# Altium PCB BoardV2.PcbDoc (part 1 of 2)
Units mm, origin at the board's own origin, x right, y up, seen from the top; angles counter-clockwise.
Board outline 173.2 x 200 mm, 2 copper layers (Top Layer, Bottom Layer); 157 components, 96 nets, 533 pads, 72 vias.
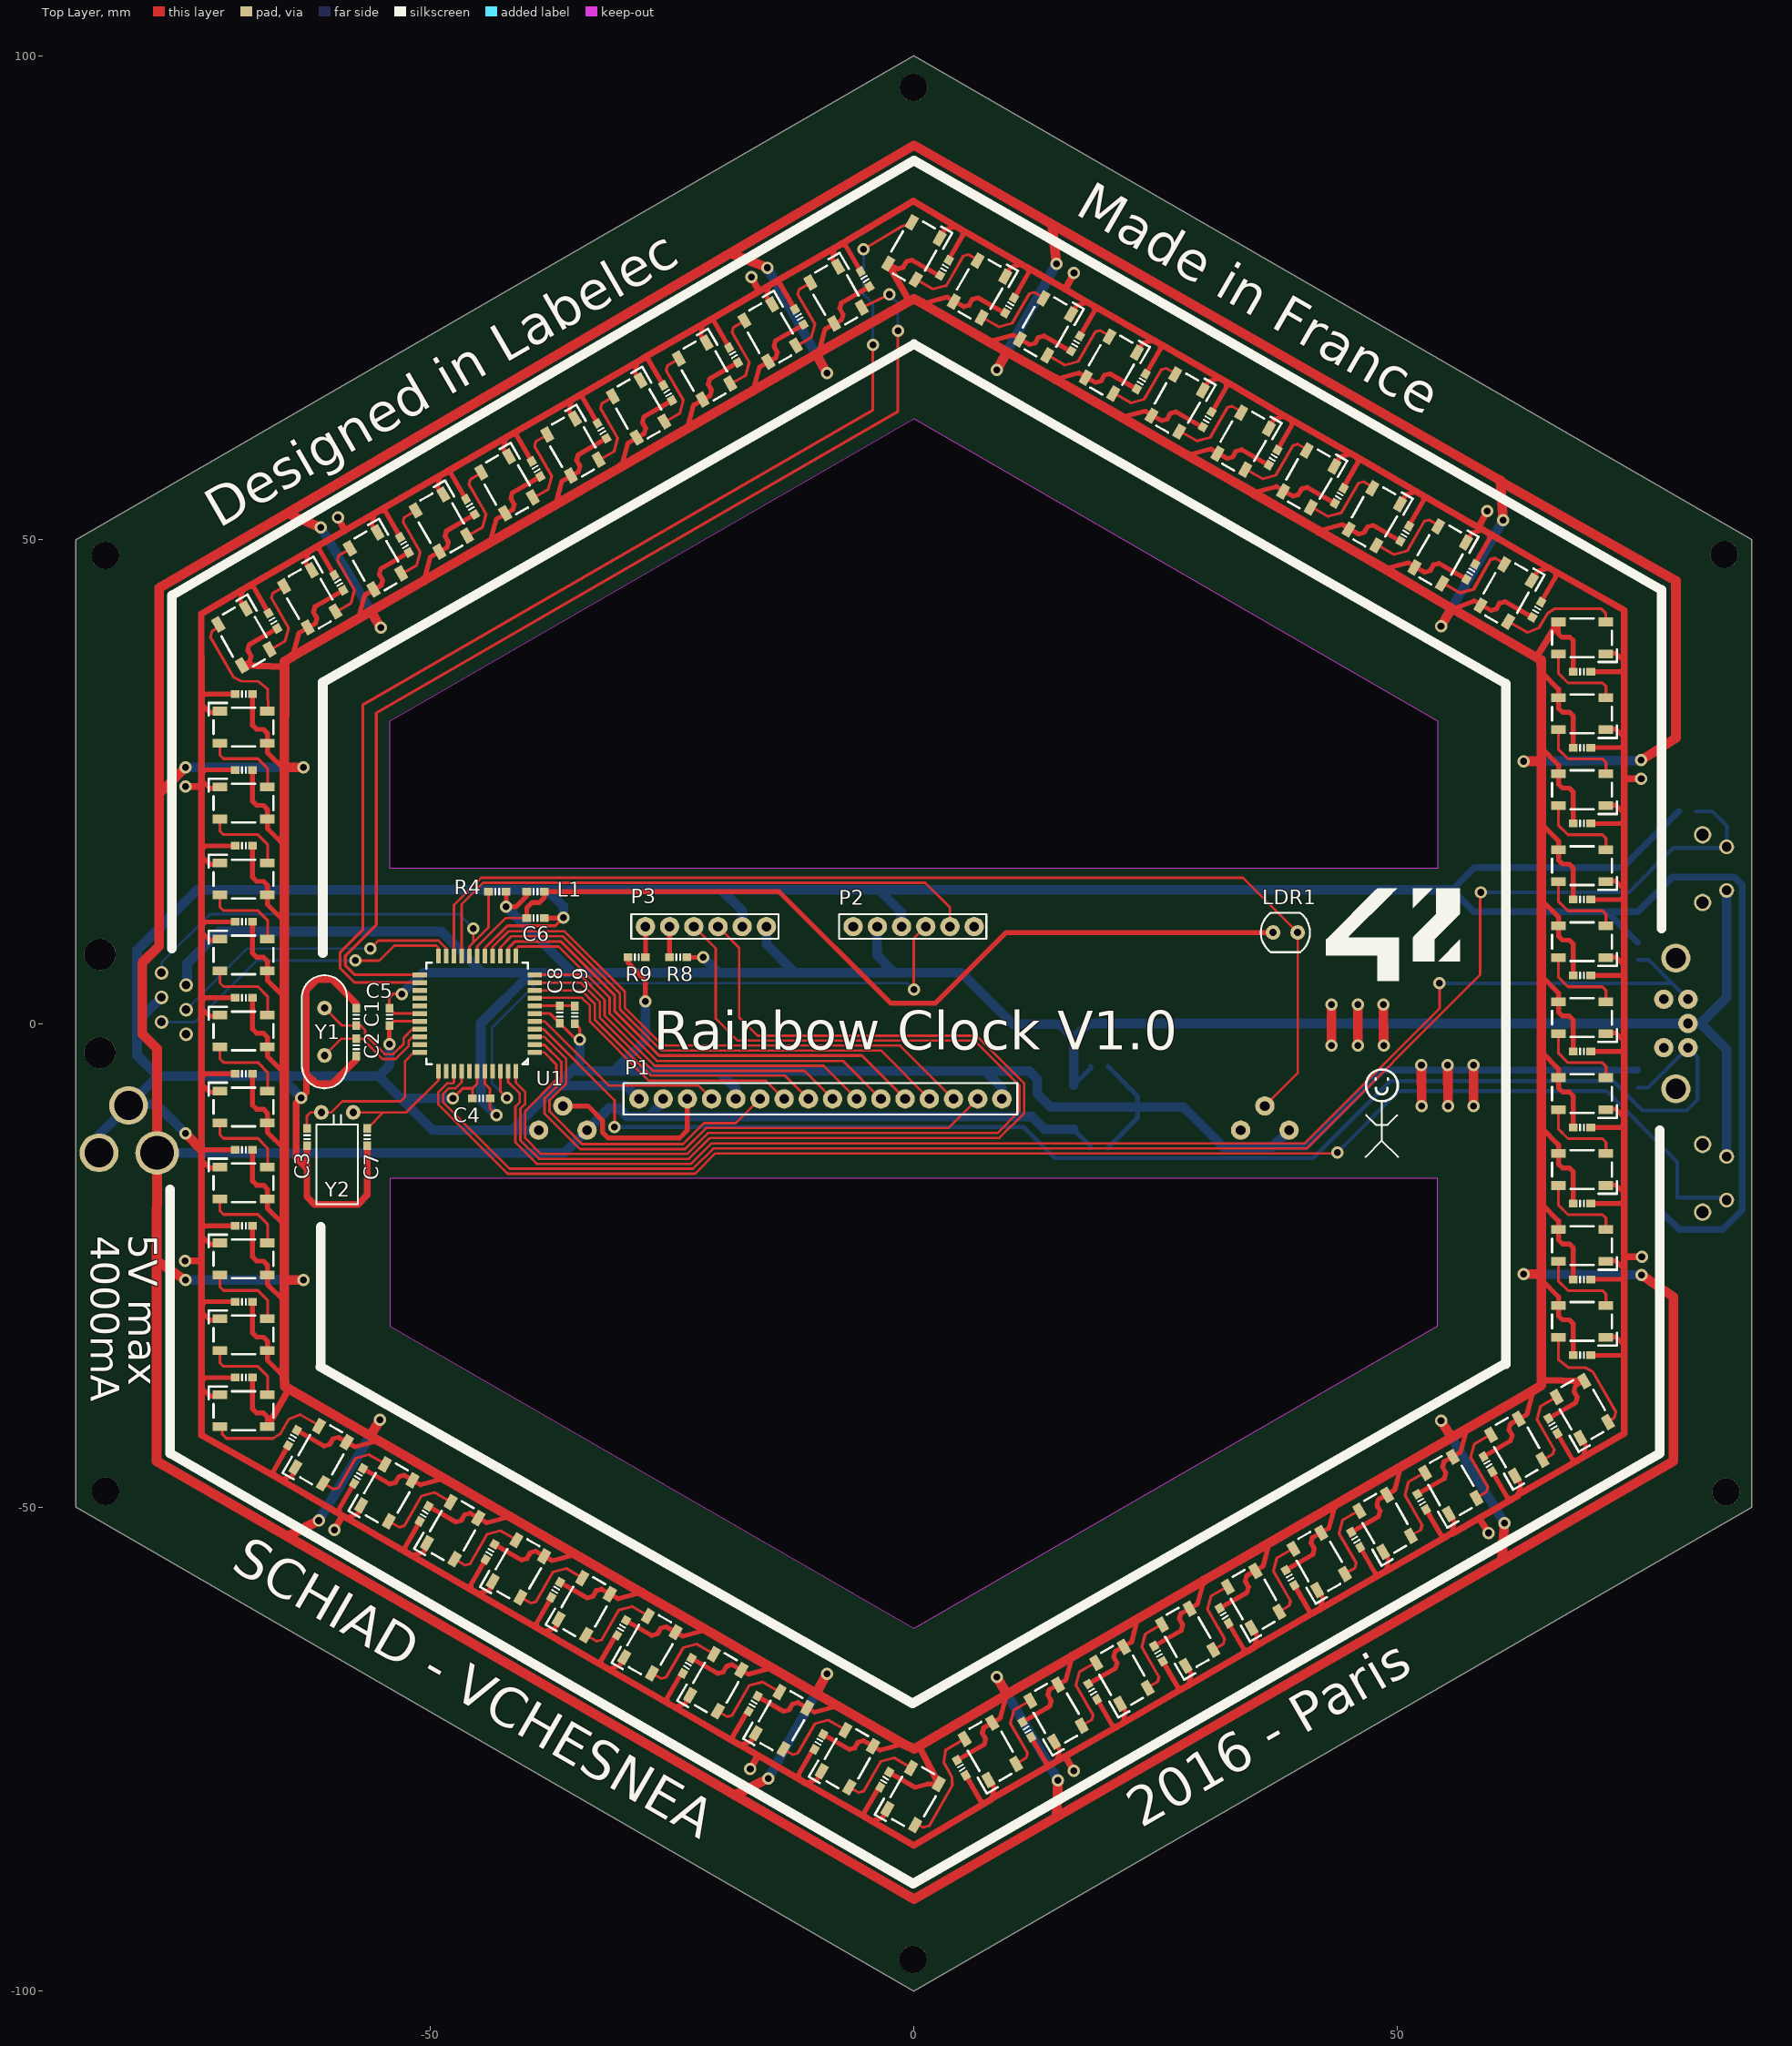
[diagram p0: Top Layer view]
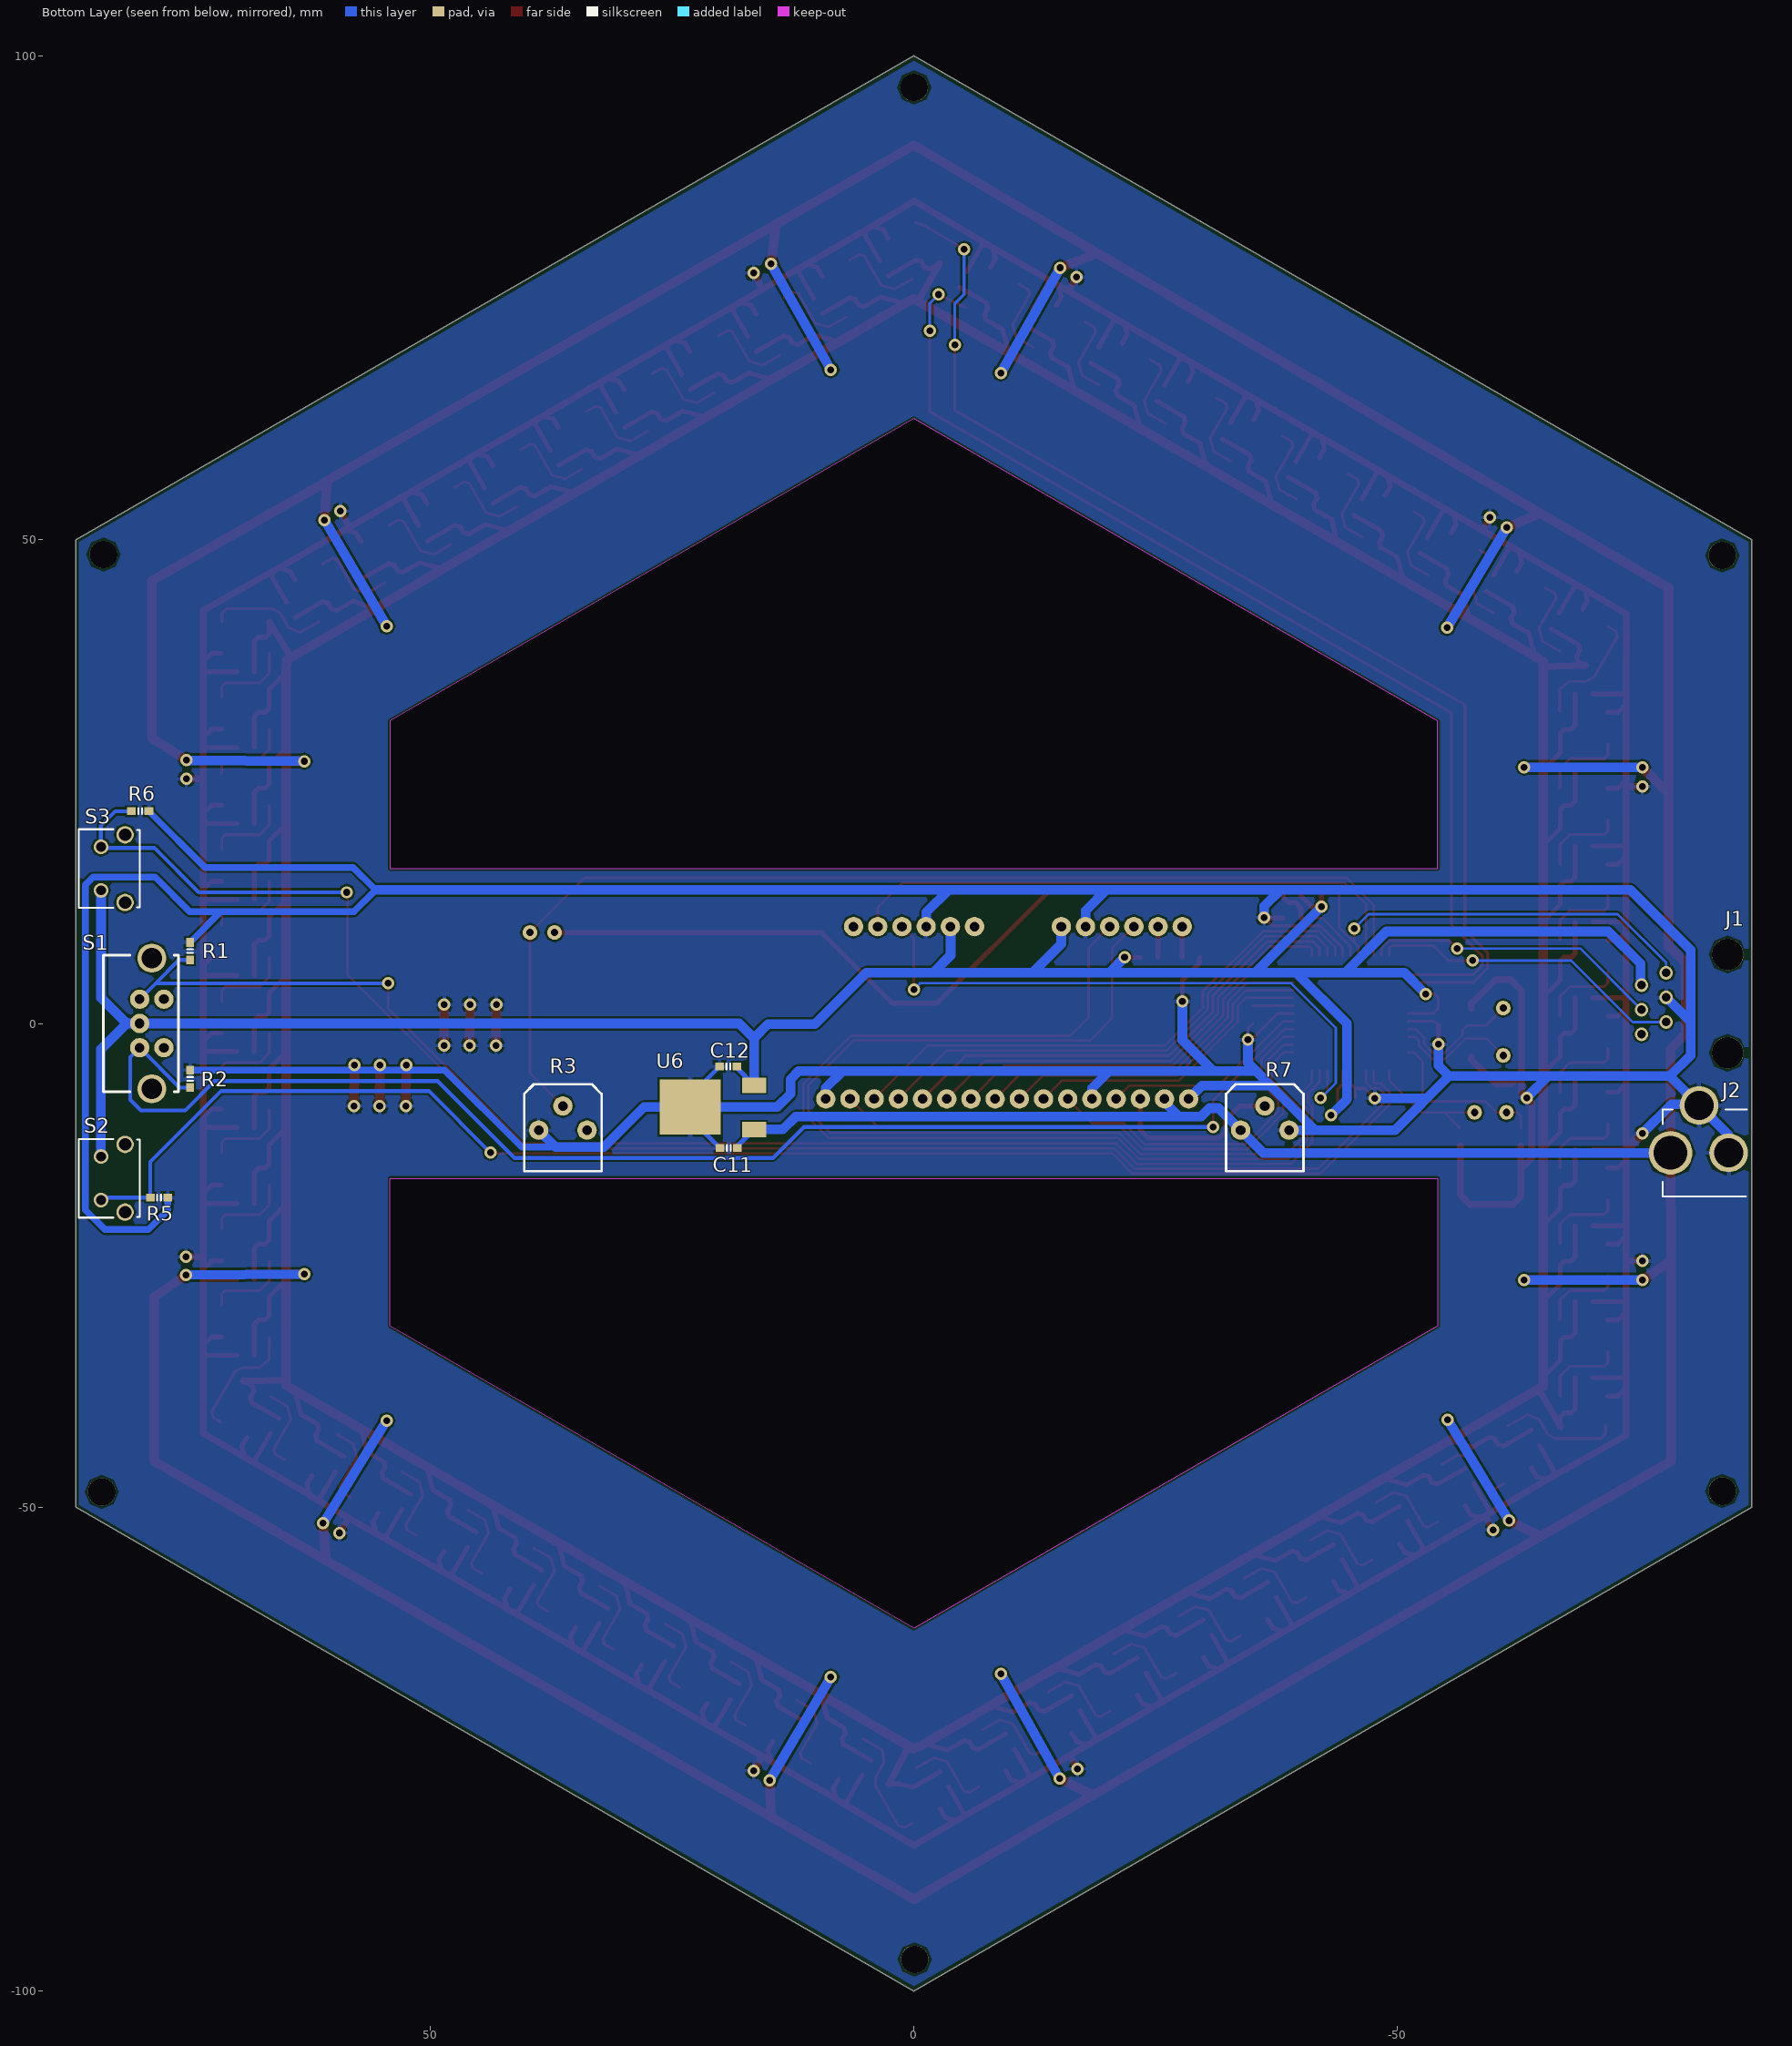
[diagram p1: Bottom Layer view, seen from below]

## Layer stack, top to bottom
Top Solder: solder mask 0.0102, Solder Resist, Dk 3.5
Top Layer: signal copper 0.0356
Dielectric 1: dielectric 0.32, FR-4, Dk 4.8
Bottom Layer: signal copper 0.0356
Bottom Solder: solder mask 0.0102, Solder Resist, Dk 3.5

## Board outline
-86.6,-50 0,-100 86.6,-50 86.6,50 0,100 -86.6,50
cut-out: -54.125,-16 -54.125,-31.25 0,-62.5 54.125,-31.25 54.125,-16
cut-out: -54.125,16 -54.125,31.25 0,62.5 54.125,31.25 54.125,16

## Design rules (kind name [scope] priority, off if disabled: settings)
AssemblyTestPointUsage [All] p1 off:
AssemblyTestpoint [All] p1 off: testpointundercomponent=TRUE minsize=1.016 maxsize=2.54 preferedsize=1.524 minholesize=0 maxholesize=1.016 preferedholesize=0.813 testpointgrid=0.025 usegrid=TRUE gridtolerance=0 allowsidetop=TRUE allowsidebottom=TRUE
Clearance [All] p1: gap=0.2
FabricationTestPointUsage [All] p1 off: valid=0 allowmultiple=FALSE
FabricationTestpoint [All] p1 off: side=3 testpointundercomponent=TRUE minsize=1.016 maxsize=2.54 preferedsize=1.524 minholesize=0 maxholesize=1.016 preferedholesize=0.813 testpointgrid=0.025 allowsidetop=TRUE allowsidebottom=TRUE usegrid=TRUE gridtolerance=0
HoleSize [All] p1: absolutevalues=TRUE maxlimit=3.5 minlimit=0.025 maxpercent=80.000 minpercent=20.000
MinimumSolderMaskSliver [All] p1: minsoldermaskwidth=0.05
PlaneConnect [All] p1: planeconnectstyle=Direct reliefexpansion=0.508 reliefentries=4 reliefconductorwidth=1 reliefairgap=0.254
PolygonConnect "PolygonConnect ALIM" [InNet('V5','GND')] p1: connectstyle=Relief reliefconductorwidth=0.4 reliefentries=4 polygonreliefangle="90 Angle" airgapwidth=0.254
PolygonConnect [All] p2: connectstyle=Relief reliefconductorwidth=0.254 reliefentries=4 polygonreliefangle="90 Angle" airgapwidth=0.254
RoutingVias [All] p1: holewidth=0.711 width=1.27 viastyle="Through Hole" minholewidth=0.711 minwidth=1.27 maxholewidth=0.711 maxwidth=1.27
SilkToSilkClearance [All] p1: silktosilkclearance=0.2
SilkToSolderMaskClearance [IsPad] p1: minsilkscreentomaskgap=0 clearancetoexposedcopper=TRUE
SolderMaskExpansion [All] p1: expansion=0.102
UnpouredPolygon [All] p1: allowunpoured=FALSE
Width [All] p1: maxlimit=1 minlimit=0.254 preferedwidth=0.254 minimp=50.000000 maximp=50.000000 favimp=50.000000
20 further rules are at their usual default settings.

## Classes and differential pairs
net class D[0..7]: D0 D1 D2 D3 D4 D5 D6 D7
component class TEMPERATURE: P3 R8 R9
component class RainbowClock: C1 C2 C3 C4 C5 C6 C7 C8 C9 J1 LDR1 R1 R2 R3 R4 R5 R6 S1 S2 S3 U1 Y1 Y2
component class LCD: P1 R7
component class BLUETOOTH: P2
component class POWER: C11 C12 J2 L1 U6
channel class Neopixel: NeoPixel1 NeoPixel2 NeoPixel3 NeoPixel4 NeoPixel5 NeoPixel6 NeoPixel7 NeoPixel8 NeoPixel9 NeoPixel10 NeoPixel11 NeoPixel12 NeoPixel13 NeoPixel14 NeoPixel15 NeoPixel16 NeoPixel17 NeoPixel18 NeoPixel19 NeoPixel20 NeoPixel21 NeoPixel22 NeoPixel23 NeoPixel24 NeoPixel25 NeoPixel26 NeoPixel27 NeoPixel28 NeoPixel29 NeoPixel30 NeoPixel31 NeoPixel32 NeoPixel33 NeoPixel34 NeoPixel35 NeoPixel36 NeoPixel37 NeoPixel38 NeoPixel39 NeoPixel40 NeoPixel41 NeoPixel42 NeoPixel43 NeoPixel44 NeoPixel45 NeoPixel46 NeoPixel47 NeoPixel48 NeoPixel49 NeoPixel50 NeoPixel51 NeoPixel52 NeoPixel53 NeoPixel54 NeoPixel55 NeoPixel56 NeoPixel57 NeoPixel58 NeoPixel59 NeoPixel60

## Components (designator, comment, footprint, x,y, rotation, side; value= is the part's Value field where it differs from the comment)
C1 "27pF" CAP0603 -57.607,0.686 r90 top
C2 "27pF" CAP0603 -57.607,-2.464 r270 top
C3 "15pF" CAP0603 -62.725,-11.75 r270 top
C4 "100nF" CAP0603 -44.704,-7.722 r0 top
C5 "100nF" CAP0603 -54.204,0.686 r90 top
C6 "100nF" CAP0603 -39.1,10.9 r180 top
C7 "15pF" CAP0603 -56.475,-11.75 r270 top
C8 "1uF" CAP0603 -36.576,0.914 r90 top
C9 "10uF" CAP0603 -35.027,0.889 r90 top
C10 "100nF" CAP0603 -5.042,76.931 r300 top
C10 "100nF" CAP0603 -11.84,73.006 r300 top
C10 "100nF" CAP0603 -18.638,69.081 r300 top
C10 "100nF" CAP0603 -25.437,65.156 r300 top
C10 "100nF" CAP0603 -32.235,61.231 r300 top
C10 "100nF" CAP0603 -39.033,57.306 r300 top
C10 "100nF" CAP0603 -45.831,53.381 r300 top
C10 "100nF" CAP0603 -52.63,49.456 r300 top
C10 "100nF" CAP0603 -59.428,45.531 r300 top
C10 "100nF" CAP0603 -66.226,41.606 r300 top
C10 "100nF" CAP0603 -69.235,34.05 r0 top
C10 "100nF" CAP0603 -69.235,26.2 r0 top
C10 "100nF" CAP0603 -69.235,18.35 r0 top
C10 "100nF" CAP0603 -69.235,10.5 r0 top
C10 "100nF" CAP0603 -69.235,2.65 r0 top
C10 "100nF" CAP0603 -69.235,-5.2 r0 top
C10 "100nF" CAP0603 -69.235,-13.05 r0 top
C10 "100nF" CAP0603 -69.235,-20.9 r0 top
C10 "100nF" CAP0603 -69.235,-28.75 r0 top
C10 "100nF" CAP0603 -69.235,-36.6 r0 top
C10 "100nF" CAP0603 -64.201,-42.83 r60 top
C10 "100nF" CAP0603 -57.403,-46.755 r60 top
C10 "100nF" CAP0603 -50.605,-50.68 r60 top
C10 "100nF" CAP0603 -43.807,-54.605 r60 top
C10 "100nF" CAP0603 -37.008,-58.53 r60 top
C10 "100nF" CAP0603 -30.21,-62.455 r60 top
C10 "100nF" CAP0603 -23.412,-66.38 r60 top
C10 "100nF" CAP0603 -16.613,-70.305 r60 top
C10 "100nF" CAP0603 -9.815,-74.23 r60 top
C10 "100nF" CAP0603 -3.017,-78.155 r60 top
C10 "100nF" CAP0603 4.909,-76.917 r120 top
C10 "100nF" CAP0603 11.682,-72.98 r120 top
C10 "100nF" CAP0603 18.48,-69.055 r120 top
C10 "100nF" CAP0603 25.278,-65.13 r120 top
C10 "100nF" CAP0603 32.076,-61.205 r120 top
C10 "100nF" CAP0603 38.875,-57.28 r120 top
C10 "100nF" CAP0603 45.673,-53.355 r120 top
C10 "100nF" CAP0603 52.471,-49.43 r120 top
C10 "100nF" CAP0603 59.321,-45.531 r120 top
C10 "100nF" CAP0603 66.047,-41.592 r120 top
C10 "100nF" CAP0603 69.05,-34.295 r180 top
C10 "100nF" CAP0603 69.05,-26.445 r180 top
C10 "100nF" CAP0603 69.05,-18.595 r180 top
C10 "100nF" CAP0603 69.05,-10.745 r180 top
C10 "100nF" CAP0603 69.05,-2.895 r180 top
C10 "100nF" CAP0603 69.05,4.955 r180 top
C10 "100nF" CAP0603 69.05,12.805 r180 top
C10 "100nF" CAP0603 69.05,20.655 r180 top
C10 "100nF" CAP0603 69.05,28.505 r180 top
C10 "100nF" CAP0603 69.05,36.355 r180 top
C10 "100nF" CAP0603 64.364,42.752 r240 top
C10 "100nF" CAP0603 57.566,46.677 r240 top
C10 "100nF" CAP0603 50.746,50.614 r240 top
C10 "100nF" CAP0603 43.948,54.539 r240 top
C10 "100nF" CAP0603 37.128,58.477 r240 top
C10 "100nF" CAP0603 30.308,62.414 r240 top
C10 "100nF" CAP0603 23.51,66.339 r240 top
C10 "100nF" CAP0603 16.707,70.267 r240 top
C10 "100nF" CAP0603 9.909,74.192 r240 top
C10 "100nF" CAP0603 3.162,78.087 r240 top
C11 "0.47uF" CAP0603 19.126,-12.878 r180 bottom
C12 "22uF" CAP0603 19.175,-4.45 r180 bottom
J1 "1-215876-3" 1-215876-3 -79.65,2.05 r180 bottom locked
J2 "PWR2.5" MJ-179PH -81.2,-10.925 r0 bottom locked
L1 "1K" RES0603 -39.1,13.625 r0 top
LDR1 "LDR" VT935G 38.4,9.4 r0 top
P1 "Header 16" "HEADER 16" -9.652,-7.798 r0 top
P2 "Header 6" "HEADER 6" -0.02,10.008 r180 top
P3 "Header 6" "HEADER 6" -21.488,10.008 r180 top locked
R1 "1K" RES0603 74.8,7.475 r90 bottom
R2 "1K" RES0603 74.8,-5.725 r270 bottom
R3 "3306P-1-203" 3306P-1-202 36.271,-9.779 r180 bottom locked
R4 "4.7K" RES0603 -43.05,13.625 r0 top
R5 "4.7K" RES0603 78,-18 r0 bottom
R6 "4.7K" RES0603 79.95,21.925 r0 bottom
R7 "3306P-1-203" 3306P-1-202 -36.271,-9.779 r180 bottom
R8 "1K" RES0603 -24.35,6.825 r180 top
R9 "1K" RES0603 -28.625,6.825 r0 top
S1 "EC11B152420G-STEC11B01" EC11B152420G-STEC11B01 80,0 r0 bottom locked
S2 "SW-PB" 1-1825027-4 82.75,-16 r270 bottom
S3 "SW-PB" 1-1825027-4 82.75,16 r270 bottom
U1 "PIC32MX110F016D-I/PT" PIC32MX110F016H-I/PT -45.125,1.025 r180 top
U3 "WS2012B" WS2812B -8.04,75.275 r120 top
U3 "WS2012B" WS2812B -14.839,71.35 r120 top
U3 "WS2012B" WS2812B -21.637,67.425 r120 top
U3 "WS2012B" WS2812B -28.435,63.5 r120 top
U3 "WS2012B" WS2812B -35.234,59.575 r120 top
U3 "WS2012B" WS2812B -42.032,55.65 r120 top
U3 "WS2012B" WS2812B -48.83,51.725 r120 top
U3 "WS2012B" WS2812B -55.628,47.8 r120 top
U3 "WS2012B" WS2812B -62.427,43.875 r120 top
U3 "WS2012B" WS2812B -69.225,39.95 r120 top
U3 "WS2012B" WS2812B -69.275,30.625 r180 top
U3 "WS2012B" WS2812B -69.275,22.775 r180 top
U3 "WS2012B" WS2812B -69.275,14.925 r180 top
U3 "WS2012B" WS2812B -69.275,7.075 r180 top
U3 "WS2012B" WS2812B -69.275,-0.775 r180 top
U3 "WS2012B" WS2812B -69.275,-8.625 r180 top
U3 "WS2012B" WS2812B -69.275,-16.475 r180 top
U3 "WS2012B" WS2812B -69.275,-24.325 r180 top
U3 "WS2012B" WS2812B -69.275,-32.175 r180 top
U3 "WS2012B" WS2812B -69.275,-40.025 r180 top
U3 "WS2012B" WS2812B -61.26,-44.575 r240 top
U3 "WS2012B" WS2812B -54.461,-48.5 r240 top
U3 "WS2012B" WS2812B -47.663,-52.425 r240 top
U3 "WS2012B" WS2812B -40.865,-56.35 r240 top
U3 "WS2012B" WS2812B -34.066,-60.275 r240 top
U3 "WS2012B" WS2812B -27.268,-64.2 r240 top
U3 "WS2012B" WS2812B -20.47,-68.125 r240 top
U3 "WS2012B" WS2812B -13.672,-72.05 r240 top
U3 "WS2012B" WS2812B -6.873,-75.975 r240 top
U3 "WS2012B" WS2812B -0.075,-79.9 r240 top
U3 "WS2012B" WS2812B 7.906,-75.216 r300 top
U3 "WS2012B" WS2812B 14.704,-71.291 r300 top
U3 "WS2012B" WS2812B 21.503,-67.366 r300 top
U3 "WS2012B" WS2812B 28.301,-63.441 r300 top
U3 "WS2012B" WS2812B 35.099,-59.516 r300 top
U3 "WS2012B" WS2812B 41.897,-55.591 r300 top
U3 "WS2012B" WS2812B 48.696,-51.666 r300 top
U3 "WS2012B" WS2812B 55.494,-47.741 r300 top
U3 "WS2012B" WS2812B 62.296,-43.814 r300 top
U3 "WS2012B" WS2812B 69.075,-39.9 r300 top
U3 "WS2012B" WS2812B 69.05,-30.8 r0 top
U3 "WS2012B" WS2812B 69.05,-22.95 r0 top
U3 "WS2012B" WS2812B 69.05,-15.1 r0 top
U3 "WS2012B" WS2812B 69.05,-7.25 r0 top
U3 "WS2012B" WS2812B 69.05,0.6 r0 top
U3 "WS2012B" WS2812B 69.05,8.45 r0 top
U3 "WS2012B" WS2812B 69.05,16.3 r0 top
U3 "WS2012B" WS2812B 69.05,24.15 r0 top
U3 "WS2012B" WS2812B 69.05,32 r0 top
U3 "WS2012B" WS2812B 69.05,39.85 r0 top
U3 "WS2012B" WS2812B 61.209,44.486 r60 top
U3 "WS2012B" WS2812B 54.389,48.424 r60 top
U3 "WS2012B" WS2812B 47.591,52.349 r60 top
U3 "WS2012B" WS2812B 40.814,56.261 r60 top
U3 "WS2012B" WS2812B 34.037,60.174 r60 top
U3 "WS2012B" WS2812B 27.217,64.111 r60 top
U3 "WS2012B" WS2812B 20.41,68.041 r60 top
U3 "WS2012B" WS2812B 13.59,71.979 r60 top
U3 "WS2012B" WS2812B 6.797,75.901 r60 top
U3 "WS2012B" WS2812B 0,79.825 r60 top
U6 "TS2940CP-3.3 C5" "TS2940CP-3.3 C5" 19.812,-8.661 r90 bottom
Y1 "8MHz XTAL" FOXSLF/080-20 -60.909,-0.864 r90 top locked
Y2 "32kHz XTAL" NCL38LF -59.588,-9.195 r180 top locked
? "Comment" "HC-06 FC-114" 0.15,46.325 r0 top
? "Comment" GY-BMP280 -28.325,19.85 r0 top
? "Comment" MC42004A6W-BNMLW -0.965,-28.448 r0 top

## Footprints (in the part's own frame and the unit in brackets; to place one, negate y for a bottom-side part, rotate by r counter-clockwise, add the part's x,y. Pads: shape width x height; smd on the part's side, far side on the other; paste and mask are expansions set on the pad)
1-215876-3 [mm] "RJ25 Header"
  round 3.25 hole 3.25 unplated: 0(4.45,-5.08) 0(4.45,5.08)
  round 1.4 hole 0.9: 1(-4.45,-3.17) 2(-1.91,-1.9) 3(-4.45,-0.63) 4(-1.91,0.64) 5(-4.45,1.91) 6(-1.91,3.18)
  body extent -5.85,-6.58 12.25,6.62, height 11.25
1-1825027-4 [mm] "Button"
  round 1.8 hole 1.3 unplated: 0(-3.5,1.24) 0(3.5,1.24)
  round 1.524 hole 1: 1(-2.25,-1.245) 2(2.25,-1.245)
  silkscreen extent -4.06,-3.56 4.06,2.75, body extent -3.2,-3.3 3.2,1.8, height 7
3306P-1-202 [mm] "Trimpot"
  round 2 hole 1: 1(-2.5,-1.25) 2(0,1.25) 3(2.5,-1.25)
  silkscreen extent -4,-5.5 4,3.5, body extent -3.4,-5.1 3.4,2.95, height 8.06
CAP0603 [mm]
  rect 0.9x0.8 smd: 1(-0.9,0) 2(0.9,0)
  silkscreen extent -0.2,-0.3 0.2,0.3, body extent -1,-0.53 1,0.52, height 1
EC11B152420G-STEC11B01 [mm]
  round 3 hole 2.1 unplated: 0(-1.25,-6.75) 0(-1.25,6.75)
  round 2 hole 1: 1(0,-2.5) 2(0,0) 3(0,2.5) D(-2.5,-2.5) E(-2.5,2.5)
  silkscreen extent -4,-7.05 3.75,7.05, body extent -4,-7 24.02,7, height 13.75
FOXSLF/080-20 [mil] "8MHz XTAL"
  round 60 hole 30: 1(-96.46,0) 2(96.46,0)
  silkscreen extent -230,-92 230,92, body extent -224,-86 224,86, height 142
GY-BMP280 [mm]
  body extent 0,-11.2 13.5,0, height 9.55
"HC-06 FC-114" [mm] "Serial to Bluetooh"
  body extent -7.65,-37.4 7.65,0, height 9.5
"HEADER 6" [mm] "Header 6"
  round 2 hole 1: 1(-6.25,0) 2(-3.75,0) 3(-1.25,0) 4(1.25,0) 5(3.75,0) 6(6.25,0)
  silkscreen extent -7.52,-1.27 7.72,1.27, body extent -7.75,-1.5 8,1.5, height 7.5
"HEADER 16" [mm] "Header 16"
  round 2 hole 1: 1(-18.75,0) 2(-16.25,0) 3(-13.75,0) 4(-11.25,0) 5(-8.75,0) 6(-6.25,0) 7(-3.75,0) 8(-1.25,0) 9(1.25,0) 10(3.75,0) 11(6.25,0) 12(8.75,0) 13(11.25,0) 14(13.75,0) 15(16.25,0) 16(18.75,0)
  silkscreen extent -20.35,-1.62 20.35,1.62, body extent -20.2,-1.5 20.2,1.5, height 7.48
MC42004A6W-BNMLW [mm] "LCD"
  round 2 on Mech1: 1(-27.35,20.6) 2(-24.85,20.6) 3(-22.35,20.6) 4(-19.85,20.6) 5(-17.35,20.6) 6(-14.85,20.6) 7(-12.35,20.6) 8(-9.85,20.6) 9(-7.35,20.6) 10(-4.85,20.6) 11(-2.35,20.6) 12(0.15,20.6) 13(2.65,20.6) 14(5.15,20.6) 15(7.65,20.6) 16(10.15,20.6)
  body extent -37.55,-23.7 39.85,22.9, height 14.35
MJ-179PH [mm] "Powerjack"
  round 4.5 hole 3.5: 1(3,2.45)
  round 4 hole 3: 2(0.05,-2.45) 3(-3,2.45)
  silkscreen extent -4.91,-2.05 3.8,6.95, body extent -10.7,-1.95 3.7,6.85, height 11
NCL38LF [mil] "32kHz XTAL"
  round 60 hole 30: 1(-64.96,0) 2(64.96,0)
  silkscreen extent -85,10 85,374, body extent -62,48 63,375, height 118
PIC32MX110F016H-I/PT [mm] "MCU"
  rect 1.5x0.5 smd: 1(-5.95,4) 2(-5.95,3.2) 3(-5.95,2.4) 4(-5.95,1.6) 5(-5.95,0.8) 6(-5.95,0) 7(-5.95,-0.8) 8(-5.95,-1.6) 9(-5.95,-2.4) 10(-5.95,-3.2) 11(-5.95,-4) 23(5.95,-4) 24(5.95,-3.2) 25(5.95,-2.4) 26(5.95,-1.6) 27(5.95,-0.8) 28(5.95,0) 29(5.95,0.8) 30(5.95,1.6) 31(5.95,2.4) 32(5.95,3.2) 33(5.95,4)
  rect 0.5x1.5 smd: 12(-4,-5.95) 13(-3.2,-5.95) 14(-2.4,-5.95) 15(-1.6,-5.95) 16(-0.8,-5.95) 17(0,-5.95) 18(0.8,-5.95) 19(1.6,-5.95) 20(2.4,-5.95) 21(3.2,-5.95) 22(4,-5.95) 34(4,5.95) 35(3.2,5.95) 36(2.4,5.95) 37(1.6,5.95) 38(0.8,5.95) 39(0,5.95) 40(-0.8,5.95) 41(-1.6,5.95) 42(-2.4,5.95) 43(-3.2,5.95) 44(-4,5.95)
  silkscreen extent -5.25,-5.25 5.25,5.25, body extent -5.05,-5.05 5.05,5.05, height 1.1
RES0603 [mm]
  rect 0.9x0.8 smd: 1(-0.9,0) 2(0.9,0)
  silkscreen extent -0.2,-0.3 0.2,0.3, body extent -1,-0.53 1,0.52, height 1
"TS2940CP-3.3 C5" [mm] "Voltage Regulator"
  rect 1.6x2.5 smd: 1(-2.285,-3.295) 3(2.285,-3.295)
  rect 5.7x6.3 smd: 2(0.015,3.295)
  body extent -3.26,-0.78 3.34,7.56, height 2.3
VT935G [mil] "Photoconductive cell"
  round 60 hole 30: 1(-50,0) 2(50,0)
  silkscreen extent -100,-80 100,80, body extent -104,-76 104,74, height 70
WS2812B [mm] "RGB Led"
  rect 1.5x0.9 smd: 1(-2.45,1.65) 2(-2.45,-1.65) 3(2.45,-1.65) 4(2.45,1.65)
  silkscreen extent -3.1,-2.5 3.6,2, body extent -2.9,-2.5 2.9,2.5, height 1.1

## Part data
C1 C2 C3 C4 C5 C6 C7 C8 C9 C10 C10 C10 C10 C10 C10 C10 C10 C10 C10 C10 C10 C10 C10 C10 C10 C10 C10 C10 C10 C10 C10 C10 C10 C10 C10 C10 C10 C10 C10 C10 C10 C10 C10 C10 C10 C10 C10 C10 C10 C10 C10 C10 C10 C10 C10 C10 C10 C10 C10 C10 C10 C10 C10 C10 C10 C10 C10 C10 C10 C11 C12: library part Cap, "Capacitor"
J1: "Tyco 1-215876-3"
J2: "Low Voltage Power Supply Connector"
L1: library part Inductor, "Inductor"
LDR1: "Photoresistor"
P1: "Header, 16-Pin"
P2 P3: "Header, 6-Pin"
R1 R2 R4 R5 R6 R8 R9: library part Res1, "Resistor"
R3 R7: library part 3306P-1-202, "Trimpot"
S1: "Rotary encoder"
S2 S3: "Switch"
U1: "Microcontroller"
U3 U3 U3 U3 U3 U3 U3 U3 U3 U3 U3 U3 U3 U3 U3 U3 U3 U3 U3 U3 U3 U3 U3 U3 U3 U3 U3 U3 U3 U3 U3 U3 U3 U3 U3 U3 U3 U3 U3 U3 U3 U3 U3 U3 U3 U3 U3 U3 U3 U3 U3 U3 U3 U3 U3 U3 U3 U3 U3 U3: "Neopixel"
U6: library part "Volt Reg", "Voltage Regulator"
Y1 Y2: library part XTAL, "Crystal Oscillator"

## Free pads (board coordinates)
  round 2.85 hole 2.85 unplated: 0(-83.541,-48.336) 0(-83.541,48.362) 0(-0.076,-96.723) 0(-0.025,96.723) 0(83.744,48.463) 0(83.922,-48.412)

## Via types
v1: diameter 1.27, hole 0.711, Top Layer to Bottom Layer, 72 vias

## Nets (pads, with @x,y where several pads share a name; then routed paths per layer and width w, separated by ;. In a path a pad name is that pad's centre, name@x,y a point inside that pad or via, vN(x,y) a via of type N, cw(c..) or ccw(c..) an arc to the next point about the centre after c; other vN are vias at no path point)
CSB: P3.5 R8.2 | length 3.2
  Top Layer w0.5: R8.2@-25.238,6.837 P3.5@-25.238,10.008
D0: P1.7 U1.8 | length 31.1
  Top Layer w0.254: U1.8@-39.175,2.645 -34.295,2.645 -33.475,1.825 -33.475,0.175 -27.391,-5.909 -15.291,-5.909 P1.7@-13.402,-7.798
D1: P1.8 U1.9 | length 33.9
  Top Layer w0.254: U1.9@-39.175,3.425 -34.357,3.425 -32.967,2.035 -32.967,0.385 -27.181,-5.401 -13.299,-5.401 P1.8@-10.902,-7.798
D2: P1.9 U1.10 | length 36.7
  Top Layer w0.254: U1.10@-39.175,4.225 -34.438,4.225 -32.458,2.245 -32.458,0.595 -26.97,-4.893 -11.307,-4.893 P1.9@-8.402,-7.798
D3: P1.10 U1.11 | length 39.6
  Top Layer w0.254: U1.11@-39.175,5.025 -34.52,5.025 -31.95,2.455 -31.95,0.805 -26.76,-4.385 -9.315,-4.385 P1.10@-5.902,-7.798
D4: P1.11 U1.12 | length 46
  Top Layer w0.254: U1.12@-41.125,6.975 -41.125,7.7 -40.875,7.95 -40.475,7.95 -36.726,7.95 -31.442,2.666 -31.442,1.016 -26.55,-3.877 -7.323,-3.877 P1.11@-3.402,-7.798
D5: P1.12 U1.13 | length 49.7
  Top Layer w0.3: U1.13@-41.925,6.975 -41.925,7.775 -41.219,8.481 -40.255,8.481 -36.506,8.481 -30.911,2.886 -30.911,1.236 -26.35,-3.325 -5.5,-3.325 ; -5.375,-3.325 P1.12@-0.902,-7.798
D6: P1.13 U1.14 | length 53.6
  Top Layer w0.254: U1.14@-42.725,6.975 -42.725,7.875 -41.588,9.012 -40.035,9.012 -36.286,9.012 -30.38,3.106 -30.38,1.456 -26.13,-2.794 -3.406,-2.794 P1.13@1.598,-7.798
D7: P1.14 U1.15 | length 57.4
  Top Layer w0.254: U1.15@-43.525,6.975 -43.525,7.9 -41.905,9.52 -39.825,9.52 -36.076,9.52 -29.872,3.316 -29.872,1.666 -25.92,-2.286 -1.414,-2.286 P1.14@4.098,-7.798
DOUT: U1.23 U3.2@-5.386,73.978 | length 113.3
  Top Layer w0.3: U1.23@-51.075,5.025 -57.775,5.025 -58.75,6 -58.75,7 -55.55,10.2 -55.55,32.075 -1.648,63.225 v1(-1.648,71.58) ; U3.2@-5.307,74.006 v1(-2.546,75.328)
  Bottom Layer w0.3: v1(-2.546,75.328) -1.648,74.43 v1(-1.648,71.58)
E: P1.6 U1.3 | length 35.4
  Top Layer w0.254: U1.3@-39.175,-1.375 -38.2,-1.375 -35.925,-3.65 -35.925,-6.23 -37.652,-7.957 -37.652,-9.101 -34.283,-12.47 -23.862,-12.47 -21.694,-10.302 -18.406,-10.302 P1.6@-15.902,-7.798
GND: C1.2 C2.2 C3.2 C4.1 C5.1 C6.1 C7.2 C8.1 C9.1 C10.1 C11.1 C12.1 J1.4 J2.2 J2.3 P1.1 P1.5 P1.16 P2.4 P3.2 R1.2 R2.1 R3.1 R5.1 R6.1 R7.3 R9.1 U1.6 U1.16 U1.29 U1.39 U3.3 U6.2 | length 1513.7
  Top Layer w0.3: v1@-54.204,-2.146 v1(-54.2,-2.15) ; C5.1@-54.204,-0.214 -53.764,0.225 U1.29@-51.075,0.225 ; v1(-47.625,-7.725) -46.6,-6.7 -45.6,-6.7 -45.125,-6.225 U1.39@-45.125,-4.925 ; C4.1@-45.604,-7.722 -45.604,-6.704 ; U1.16@-44.325,6.975 -44.325,7.776 -42.005,10.096 -37.054,10.096 v1@-36.25,10.9 ; U1.6@-39.175,1.025 -37.587,1.025 C8.1@-36.576,0.014 -34.887,-1.675 v1(-34.525,-1.675) -34.525,-0.513 C9.1@-35.027,-0.011
  Top Layer w0.5: -73.608,-36.982 -73.225,-36.6 C10.1@-70.135,-36.6 ; -73.608,-29.132 -73.225,-28.75 C10.1@-70.135,-28.75 ; -73.608,-21.282 -73.225,-20.9 C10.1@-70.135,-20.9 ; -73.608,-13.432 -73.225,-13.05 C10.1@-70.135,-13.05 ; -73.608,-5.582 -73.225,-5.2 C10.1@-70.135,-5.2 ; -73.608,2.268 -73.225,2.65 C10.1@-70.135,2.65 ; -73.608,10.118 -73.225,10.5 C10.1@-70.135,10.5 ; -73.608,17.968 -73.225,18.35 C10.1@-70.135,18.35 ; -73.608,25.818 -73.225,26.2 C10.1@-70.135,26.2 ; -73.608,33.668 -73.225,34.05 C10.1@-70.135,34.05 ; -73.583,-37.67 -72.753,-38.499 U3.3@-71.708,-38.499 ; -73.583,-29.82 -72.753,-30.649 U3.3@-71.708,-30.649 ; -73.583,-21.97 -72.753,-22.799 U3.3@-71.708,-22.799 ; -73.583,-14.12 -72.753,-14.949 U3.3@-71.708,-14.949 ; -73.583,-6.27 -72.753,-7.099 U3.3@-71.708,-7.099 ; -73.583,1.58 -72.753,0.751 U3.3@-71.708,0.751 ; -73.583,9.43 -72.753,8.601 U3.3@-71.708,8.601 ; -73.583,17.28 -72.753,16.451 U3.3@-71.708,16.451 ; -73.583,25.13 -72.753,24.301 U3.3@-71.708,24.301 ; -73.583,32.98 -72.753,32.151 U3.3@-71.708,32.151 ; -69.327,44.837 -69.63,43.703 U3.3@-69.108,42.799 ; -68.744,45.202 -68.222,45.062 C10.1@-66.676,42.386 ; -66.078,-46.73 -66.197,-46.286 C10.1@-64.652,-43.61 ; -65.449,-47.13 -64.316,-46.827 U3.3@-63.793,-45.922 ; -62.528,48.762 -62.832,47.628 -62.33,46.76 U3.3@-62.31,46.724 ; -61.945,49.127 -61.423,48.987 C10.1@-59.878,46.311 ; -59.258,-50.733 -59.398,-50.211 C10.1@-57.853,-47.535 ; -58.651,-51.055 -57.517,-50.752 U3.3@-56.995,-49.847 ; -55.73,52.687 -56.034,51.553 -55.532,50.685 U3.3@-55.511,50.649 ; -55.147,53.052 -55.142,53.05 -54.625,52.912 C10.1@-53.08,50.236 ; v1@-54.204,-2.146 C5.1@-54.204,-0.214 ; -52.46,-54.658 -52.6,-54.136 C10.1@-51.055,-51.46 ; -51.852,-54.98 -50.719,-54.677 U3.3@-50.197,-53.772 ; -48.932,56.612 -49.235,55.478 U3.3@-48.713,54.574 ; -48.349,56.977 -47.827,56.837 C10.1@-46.281,54.161 ; -45.662,-58.583 -45.802,-58.061 C10.1@-44.257,-55.385 ; -45.054,-58.905 -43.921,-58.602 U3.3@-43.399,-57.697 ; -42.133,60.537 -42.437,59.403 -41.935,58.535 U3.3@-41.915,58.499 ; -41.551,60.902 -41.028,60.762 C10.1@-39.483,58.086 ; -38.864,-62.508 -39.003,-61.986 C10.1@-37.458,-59.31 ; -38.256,-62.83 -37.123,-62.527 U3.3@-36.6,-61.622 ; C6.1@-38.2,10.9 v1@-36.25,10.9 ; -35.335,64.462 -35.639,63.328 -35.137,62.46 U3.3@-35.116,62.424 ; -34.747,64.825 -34.23,64.687 C10.1@-32.685,62.011 ; -32.192,-66.36 -32.325,-65.861 C10.1@-30.78,-63.185 ; -31.578,-66.705 -30.444,-66.401 U3.3@-29.922,-65.497 ; R9.1@-29.525,6.825 -29.525,6.25 -27.75,4.475 v1(-27.75,2.3) ; -28.537,68.387 -28.84,67.253 U3.3@-28.318,66.349 ; -27.954,68.752 -27.432,68.612 C10.1@-25.887,65.936 ; -25.393,-70.285 -25.527,-69.786 C10.1@-23.982,-67.11 ; -24.779,-70.63 -23.646,-70.326 U3.3@-23.124,-69.422 ; -21.738,72.312 -22.042,71.178 -21.541,70.31 U3.3@-21.52,70.274 ; -21.15,72.675 -20.633,72.537 C10.1@-19.088,69.861 ; -18.595,-74.21 -18.729,-73.711 C10.1@-17.184,-71.035 ; -17.981,-74.555 -16.848,-74.251 U3.3@-16.326,-73.347 ; -14.94,76.237 -15.244,75.103 U3.3@-14.721,74.199 ; -14.357,76.602 -13.835,76.462 C10.1@-12.29,73.786 ; -11.797,-78.135 -11.93,-77.636 C10.1@-10.385,-74.96 ; -11.183,-78.48 -10.05,-78.176 U3.3@-9.527,-77.272 ; -8.142,80.162 -8.445,79.028 -7.944,78.16 U3.3@-7.923,78.124 ; -7.553,80.525 -7.037,80.387 C10.1@-5.492,77.711 ; -5.001,-82.049 -5.132,-81.561 C10.1@-3.587,-78.885 ; -4.384,-82.405 -3.251,-82.101 U3.3@-2.729,-81.197 ; U3.3@2.67,81.14 3.192,82.045 4.359,82.358 ; C10.1@3.528,78.828 5.073,81.504 4.933,82.027 ; C10.1@5.359,-77.697 6.905,-80.373 7.427,-80.513 8,-80.182 ; U3.3@7.791,-78.11 8.313,-79.014 8.01,-80.147 ; U3.3@9.476,77.241 9.999,78.146 11.13,78.449 ; C10.1@10.334,74.929 11.88,77.605 11.74,78.128 ; C10.1@12.132,-73.759 13.677,-76.435 14.199,-76.575 ; U3.3@14.563,-74.172 14.576,-74.194 15.085,-75.077 14.782,-76.21 ; U3.3@16.296,73.304 16.819,74.208 17.986,74.521 ; C10.1@17.154,70.992 18.699,73.668 18.56,74.19 ; C10.1@18.93,-69.834 20.475,-72.51 20.997,-72.65 ; U3.3@21.361,-70.247 21.884,-71.152 21.58,-72.285 ; U3.3@23.116,69.395 23.638,70.3 24.771,70.604 ; C10.1@23.974,67.083 25.519,69.76 25.379,70.282 ; C10.1@25.728,-65.909 27.273,-68.585 27.796,-68.725 ; U3.3@28.16,-66.322 28.682,-67.227 28.378,-68.36 ; U3.3@29.936,65.458 30.458,66.363 31.625,66.675 ; C10.1@30.794,63.146 32.339,65.822 32.199,66.344 ; C10.1@32.526,-61.984 34.072,-64.66 34.594,-64.8 ; U3.3@34.958,-62.397 35.48,-63.302 35.177,-64.435 ; U3.3@36.712,61.545 37.235,62.45 38.402,62.763 ; C10.1@37.57,59.233 39.116,61.91 38.976,62.432 ; C10.1@39.325,-58.059 40.87,-60.735 41.358,-60.866 ; U3.3@41.756,-58.472 42.279,-59.377 41.975,-60.51 ; U3.3@43.501,57.655 44.024,58.559 45.157,58.863 ; C10.1@44.36,55.342 45.905,58.019 45.765,58.541 ; C10.1@46.123,-54.134 47.668,-56.81 48.156,-56.941 ; U3.3@48.555,-54.547 49.077,-55.452 48.773,-56.585 ; U3.3@50.3,53.73 50.822,54.634 51.989,54.947 ; C10.1@51.158,51.417 52.703,54.094 52.563,54.616 ; C10.1@52.921,-50.209 54.467,-52.885 54.989,-53.025 ; U3.3@55.353,-50.622 55.875,-51.527 55.572,-52.66 ; U3.3@57.12,49.792 57.642,50.697 58.438,50.91 58.809,51.01 ; C10.1@57.978,47.48 59.523,50.156 59.383,50.678 ; C10.1@59.771,-46.311 61.316,-48.987 61.839,-49.127 ; U3.3@62.203,-46.724 62.725,-47.628 62.43,-48.729 ; U3.3@63.956,45.844 64.479,46.748 65.612,47.052 ; C10.1@64.814,43.531 66.36,46.208 66.22,46.73 65.646,47.061 ; C10.1@66.497,-42.371 68.042,-45.047 68.565,-45.187 ; U3.3@68.929,-42.784 69.451,-43.689 69.147,-44.822 ; C10.1@69.95,-34.295 73.04,-34.295 ; C10.1@69.95,-26.445 73.04,-26.445 73.423,-26.063 ; C10.1@69.95,-18.595 73.04,-18.595 73.423,-18.213 ; C10.1@69.95,-10.745 73.04,-10.745 73.423,-10.363 ; C10.1@69.95,-2.895 73.04,-2.895 73.423,-2.513 ; C10.1@69.95,4.955 73.04,4.955 73.423,5.337 ; C10.1@69.95,12.805 73.04,12.805 73.423,13.187 ; C10.1@69.95,20.655 73.04,20.655 73.423,21.037 ; C10.1@69.95,28.505 73.04,28.505 73.423,28.887 ; C10.1@69.95,36.355 73.04,36.355 73.423,36.737 ; U3.3@71.523,-32.396 72.568,-32.396 73.398,-33.225 ; U3.3@71.523,-24.546 72.568,-24.546 73.398,-25.375 ; U3.3@71.523,-16.696 72.568,-16.696 73.398,-17.525 ; U3.3@71.523,-8.846 72.568,-8.846 73.398,-9.675 ; U3.3@71.523,-0.996 72.568,-0.996 73.398,-1.825 ; U3.3@71.523,6.854 72.568,6.854 73.398,6.025 ; U3.3@71.523,14.704 72.568,14.704 73.398,13.875 ; U3.3@71.523,22.554 72.568,22.554 73.398,21.725 ; U3.3@71.523,30.404 72.568,30.404 73.398,29.575 ; U3.3@71.523,38.254 72.568,38.254 73.398,37.425
  Top Layer w0.7: v1(-75.3,-24.55) -73.633,-24.55 ; v1(-75.275,24.5) -73.608,24.5 ; -73.611,-37.648 -73.611,-42.55 -66.057,-46.808 -59.028,-50.866 ; -73.608,-37.645 -73.608,-36.982 -73.608,-29.132 -73.608,-21.282 -73.608,-13.432 -73.608,-13.042 -73.608,-5.582 -73.608,2.268 -73.608,10.118 -73.608,17.968 -73.608,24.5 ; -68.85,45.136 -73.643,42.301 -73.608,33.668 -73.608,25.818 -73.608,24.5 ; -68.744,45.202 -61.945,49.127 -58.805,50.94 ; -66.078,-46.73 -66.028,-46.758 -65.42,-47.099 ; C3.2@-62.725,-12.65 -62.725,-15.025 ; v1(-59.875,-52.325) -59.028,-50.866 ; v1(-59.525,52.3) -58.805,50.94 ; C2.2@-57.607,-3.435 -57.607,-3.732 -60.123,-6.248 -61.727,-6.248 -62.775,-5.2 ; C1.2@-57.607,1.586 -57.607,2.032 -60.12,4.545 -61.655,4.545 -62.775,3.425 -62.775,-5.2 ; C7.2@-56.475,-12.65 -56.475,-17.731 -57.438,-18.695 -61.93,-18.695 -62.725,-17.9 -62.725,-15.025 ; -55.147,53.052 -58.805,50.94 ; -55.142,53.05 -48.455,56.911 ; -48.349,56.977 -41.551,60.902 -34.752,64.827 ; -34.747,64.825 -28.06,68.686 ; -27.954,68.752 -21.156,72.677 ; -21.15,72.675 -15.967,75.668 ; v1(-16.9,-77.05) -16.119,-75.64 ; v1(-16.8,77.125) -15.967,75.668 ; 7.984,-80.186 -0.011,-84.93 -4.384,-82.405 -5.001,-82.049 -11.183,-78.48 -11.194,-78.483 -11.797,-78.135 -16.119,-75.64 ; 8.009,-80.149 14.199,-76.575 15.64,-75.743 ; 11.703,78.118 11.13,78.449 4.933,82.027 4.359,82.358 -0.04,84.984 -7.553,80.525 -14.352,76.6 -15.967,75.668 ; 11.74,78.128 15.653,75.868 ; v1(16.539,-77.227) 15.64,-75.743 ; v1(16.55,77.55) 15.653,75.868 ; v1(59.25,52.95) 58.338,51.282 ; v1(59.375,-52.65) 58.408,-51.108 ; 65.602,47.088 59.383,50.678 58.809,51.01 58.338,51.282 ; 65.646,47.061 73.423,42.69 73.423,36.737 73.423,28.887 73.423,25.275 ; 68.56,-45.186 73.425,-42.377 73.425,-33.253 ; 68.565,-45.187 62.43,-48.729 62.412,-48.796 61.839,-49.127 58.408,-51.108 ; 73.423,-33.2 73.423,-26.063 73.423,-24.125 ; v1(75.175,25.275) 73.423,25.275 ; v1(75.225,-24.125) 73.423,-24.125 ; -62.775,-5.2 -62.775,-7.125 v1(-63.325,-7.675) -63.85,-8.2 -63.85,-13.9 -62.725,-15.025 ; -59.028,-50.866 -32.192,-66.36 -25.393,-70.285 -18.595,-74.21 -16.119,-75.64 ; 15.64,-75.743 20.997,-72.65 27.796,-68.725 28.412,-68.369 34.594,-64.8 35.167,-64.469 35.177,-64.435 41.358,-60.866 41.975,-60.51 48.156,-56.941 48.73,-56.61 48.764,-56.619 54.989,-53.025 55.562,-52.694 55.629,-52.712 58.408,-51.108 ; 15.653,75.868 17.986,74.521 18.56,74.19 24.771,70.604 24.805,70.613 25.379,70.282 31.625,66.675 32.199,66.344 38.402,62.763 38.976,62.432 45.157,58.863 45.191,58.872 45.765,58.541 51.989,54.947 52.563,54.616 58.338,51.282 ; 73.423,-24.125 73.423,-18.213 73.423,-10.363 73.423,-2.513 73.423,5.337 73.423,13.187 73.423,21.037 73.423,25.275
  Top Layer w1: v1(-75.275,-11.375) -73.608,-13.042 ; v1(43.15,1.95) v1(43.175,-2.275) ; v1(45.875,1.95) v1(45.9,-2.275) ; v1(48.525,1.95) v1(48.55,-2.275) ; v1(52.45,-4.325) v1(52.475,-8.55) ; v1(55.175,-4.325) v1(55.2,-8.55) ; v1(57.825,-4.325) v1(57.85,-8.55)
  Bottom Layer w0.5: C11.1@20.026,-12.878 23.107,-9.797 U6.2@23.107,-8.646 23.107,-7.482 C12.1@20.075,-4.45
  Bottom Layer w0.7: 37.017,-12.783 40.517,-12.783 48.475,-4.825 R2.1@74.8,-4.825 ; 55.8,13.625 57.875,11.55 71.625,11.55 ; 55.8,13.975 57.95,16.125 73.25,16.125 R6.1@79.05,21.925 ; R1.2@74.8,8.375 71.625,11.55 ; R5.1@77.1,-18 77.1,-19.3 79.1,-21.3 83.6,-21.3 85.611,-19.289 85.611,14.316 84.811,15.116 78.391,15.116 74.825,11.55 71.625,11.55
  Bottom Layer w1: J2.3@-84.2,-13.375 -84.2,-11.525 J2.2@-81.15,-8.475 -78.125,-5.45 ; J2.2@-81.277,-8.348 -78.302,-8.348 v1(-75.275,-11.375) ; J1.4@-77.74,2.69 -80.275,0.155 ; v1(-63.325,-7.675) -65.55,-5.45 ; v1(-54.2,-2.15) -54.2,-4.35 -55.3,-5.45 ; -52.8,-7.725 v1(-47.625,-7.725) ; R7.3@-38.771,-11.029 -41.475,-11.029 ; v1(-36.2,10.95) -36.2,12.1 -37.925,13.825 ; v1(-34.525,-1.675) -34.525,-4.079 -35.346,-4.9 ; P1.1@-28.402,-7.798 -29.78,-6.42 -36.866,-6.42 ; v1(-27.75,2.3) -27.75,-1.725 -30.925,-4.9 ; -20.15,-4.95 -18.402,-6.698 P1.5@-18.402,-7.798 ; P3.2@-17.738,10.008 -17.738,11.638 -19.925,13.825 ; -3.575,13.775 -1.3,11.5 -1.3,9.978 P2.4@-1.47,9.808 ; P1.16@9.098,-7.798 9.098,-6.648 7.35,-4.9 ; R3.1@38.771,-11.029 37.017,-12.783 32.017,-12.783 27.881,-8.646 U6.2@23.107,-8.646 14.121,-8.646 12.75,-7.275 12.75,-5.75 11.9,-4.9 7.35,-4.9 ; 55.6,13.825 -19.925,13.825 ; -80.275,0.155 -80.275,7.575 -74.025,13.825 -37.925,13.825 ; -80.275,0.155 -80.275,-3.3 -78.125,-5.45 ; -78.125,-5.45 -65.55,-5.45 ; -65.55,-5.45 -55.3,-5.45 ; -55.3,-5.45 -49.721,-11.029 -41.475,-11.029 ; -41.475,-11.029 -36.866,-6.42 ; -37.925,13.825 -19.925,13.825 ; -36.866,-6.42 -35.346,-4.9 ; -35.346,-4.9 -30.925,-4.9 ; -30.925,-4.9 7.35,-4.9
INT0: R1.1 S1.1 U1.43 | length 144.6
  Top Layer w0.254: U1.43@-41.925,-4.925 -41.925,-6.043 -40.725,-7.243 -40.725,-8.156 -41.168,-8.599 -41.168,-12.294 -38.96,-14.502 -23.02,-14.502 -20.928,-12.41 40.365,-12.41 54.325,1.55 v1@54.325,4.175
  Bottom Layer w0.4: v1(54.325,4.15) 78.35,4.15 ; R1.1@74.8,6.575 75.925,6.575 78.35,4.15 ; S1.1@80,2.5 78.35,4.15
INT1: R6.2 S3.1 U1.37 | length 164.5
  Top Layer w0.254: U1.37@-46.725,-4.925 -46.725,-6.074 -47.351,-6.7 -48.037,-6.7 -48.641,-7.304 -48.641,-8.146 -41.777,-15.01 -22.81,-15.01 -20.718,-12.918 40.575,-12.918 58.525,5.032 v1@58.525,13.475
  Bottom Layer w0.4: v1(58.6,13.55) 73.9,13.55 78.496,18.146 83.891,18.146 S3.1@83.995,18.25 84.025,18.28 84.025,20.425 82.525,21.925 R6.2@80.85,21.925
INT2: R5.2 S2.2 U1.36 | length 151
  Top Layer w0.254: U1.36@-47.525,-4.925 -47.525,-6.105 -47.612,-6.192 -48.247,-6.192 -49.149,-7.094 -49.149,-8.356 -41.987,-15.518 -22.6,-15.518 -20.508,-13.426 43.674,-13.426 v1(43.75,-13.35)
  Bottom Layer w0.4: v1(43.75,-13.35) 50.125,-6.975 71.575,-6.975 78.9,-14.3 R5.2@78.9,-18 83.745,-18 S2.2@83.995,-18.25
INT3: R2.2 S1.3 U1.4 | length 145
  Top Layer w0.254: U1.4@-39.175,-0.575 -38.282,-0.575 -30.925,-7.932 v1(-30.925,-10.7)
  Bottom Layer w0.4: v1(-30.925,-10.7) 11.35,-10.7 14.55,-13.9 41.275,-13.9 49.225,-5.95 72.275,-5.95 75.3,-8.975 79.875,-8.975 80.975,-7.875 80.975,-3.475 S1.3@80,-2.5 75.875,-6.625 R2.2@74.8,-6.625
LED+: P1.15 U1.2 | length 57.9
  Top Layer w0.254: U1.2@-39.141,-2.209 -38.191,-2.209 -36.433,-3.967 -36.433,-6.019 -38.16,-7.747 -38.16,-9.311 -34.494,-12.978 -23.652,-12.978 -21.484,-10.81 3.586,-10.81 P1.15@6.598,-7.798
MCLR: J1.6 R4.1 U1.18 | length 44.9
  Top Layer w0.254: U1.18@-45.925,6.975 -45.925,7.943 -43.95,9.918 R4.1@-43.95,13.625 ; -45.525,8.357 v1(-45.525,9.825)
  Bottom Layer w0.254: J1.6@-77.74,5.23 -77.74,6.285 -72.725,11.3 -47,11.3 v1(-45.525,9.825)
NetC8_2: C8.2 C9.2 U1.7 | length 4.1
  Top Layer w0.3: U1.7@-39.175,1.825 C9.2@-35.063,1.825
NetLDR1_2: LDR1.2 R3.2 U1.20 | length 115.3
  Top Layer w0.254: U1.20@-47.525,6.975 -47.525,12.25 -44.725,15.05 34.02,15.05 LDR1.2@39.67,9.4 39.67,-5.13 R3.2@36.271,-8.529
OSCI: C1.1 U1.30 Y1.2 | length 13.5
  Top Layer w0.254: Y1.2@-60.909,1.586 -59.109,-0.214 C1.1@-57.607,-0.214 -57.186,-0.214 -56.7,-0.7 -56.7,-1.157 -54.691,-3.166 -53.779,-3.166 -52.725,-2.112 -52.725,-1.486 -51.814,-0.575 U1.30@-51.075,-0.575
OSCO: C2.1 U1.31 Y1.1 | length 12.7
  Top Layer w0.254: Y1.1@-60.909,-3.314 -59.159,-1.564 C2.1@-57.607,-1.564 -57.011,-1.564 -54.901,-3.674 -53.569,-3.674 -52.206,-2.311 -52.206,-1.767 -51.814,-1.375 U1.31@-51.075,-1.375
PGEC: J1.2 U1.22 | length 32.8
  Top Layer w0.254: v1(-57.725,6.5) -55.25,6.5 -53.7,8.05 -49.375,8.05 -49.125,7.8 U1.22@-49.125,6.975
  Bottom Layer w0.254: J1.2@-77.74,0.15 -74.275,0.15 -67.925,6.5 v1(-57.725,6.5)
PGED: J1.3 U1.21 | length 31
  Top Layer w0.254: v1(-56.15,7.75) -55.342,8.558 -49.108,8.558 -48.325,7.775 U1.21@-48.325,6.975
  Bottom Layer w0.254: J1.3@-75.2,1.42 -68.87,7.75 v1(-56.15,7.75)
PX1: U1.24 U3.4@-0.204,82.772 | length 120.7
  Top Layer w0.3: U1.24@-51.075,4.225 -57.783,4.225 -59.3,5.742 -59.3,7.3 -56.95,9.65 -56.95,32.925 -4.239,63.389 v1(-4.239,70.107) ; v1(-5.196,80.003) -1.221,82.378 U3.4@-0.125,82.8
  Bottom Layer w0.3: v1(-5.196,80.003) -5.196,75.356 -4.239,74.399 v1(-4.239,70.107)
PX2: U3.2@0.204,76.878 U3.4@6.593,78.847 | length 8.7
  Top Layer w0.3: U3.2@0.22,76.897 1.978,75.882 3.351,76.25 5.126,79.324 5.634,79.46 U3.4@6.618,78.891
PX3: U3.2@7.001,72.954 U3.4@13.386,74.925 | length 8.7
  Top Layer w0.3: U3.2@7.026,72.998 8.785,71.983 10.158,72.351 11.933,75.425 12.44,75.561 U3.4@13.425,74.992